# EAGLE board LED-driver I2C (EAGLE 6.3)

Size 160 x 100 mm. Coordinates in mm from the lower left corner, seen from the top.
Outline: 0,0 160,0 160,100 0,100 0,0
Copper layers (1*16): Top 0.035mm / dielectric 1.5mm / Bottom 0.035mm
Design rules "default": minimum track width 10mil, minimum drill 24mil, track to track 8mil, track to pad 8mil, pad to pad 8mil, via to via 8mil, smd to smd 8mil, copper to edge 40mil, drill to drill 8mil, minimum pad ring 10mil, minimum via ring 8mil, stop-mask expansion 4mil, vias tented up to drill 0mil, thermal gap 10mil

## Footprints (pad centres in the part's own frame; a part is rotated, then mirrored left to right if it is on the bottom)
SO16W = smd 0.6 x 2.2: 1 -4.445,-4.6; 2 -3.175,-4.6; 3 -1.905,-4.6; 4 -0.635,-4.6; 5 0.635,-4.6; 6 1.905,-4.6; 7 3.175,-4.6; 8 4.445,-4.6; 9 4.445,4.6; 10 3.175,4.6; 11 1.905,4.6; 12 0.635,4.6; 13 -0.635,4.6; 14 -1.905,4.6; 15 -3.175,4.6; 16 -4.445,4.6
TO252 = smd 1 x 1.6: 1 -2.28,-4.8; 2 2.28,-4.8 | smd 5.4 x 6.2: 3 0,2.5
RJ11-NO_SHIELD = drill 0.9 pad 1.4: 1 -3.175,8.89; 2 -1.905,6.35; 3 -0.635,8.89; 4 0.635,6.35; 5 1.905,8.89; 6 3.175,6.35 | hole 3.251: -5.08,0; 5.08,0
MA04-1 = drill 1.016 long: 1 -3.81,0; 2 -1.27,0; 3 1.27,0; 4 3.81,0
TO263 = smd 1 x 3.4: 1 -2.54,-6.6; 2 2.54,-6.6 | smd 6.8 x 9.6: 3 0,3.5
R0402 = smd 0.7 x 0.9: 1 -0.65,0; 2 0.65,0
SMS-003 = smd 1.092 x 2.007: 1 -2.54,-4.496; 2 0,-4.496; 3 2.54,-4.496; 4 2.54,4.496; 5 0,4.496; 6 -2.54,4.496

## Placement (x,y rotation side)
IC1  PCF8574T  [SO16W]  95.25,62.23 270 top
IC2  7805DT  [TO252]  41.91,87.63 0 top
J1  RJ11-2L-B  [RJ11-NO_SHIELD]  11.43,58.42 270 top
J2  RJ11-2L-B  [RJ11-NO_SHIELD]  11.43,77.47 270 top
LEDSTRIP  [MA04-1]  15.24,7.62 180 top
Q1  SPB80P06P  [TO263]  45.72,35.56 0 top
Q2  SPB80P06P  [TO263]  27.94,36.83 0 top
Q3  SPB80P06P  [TO263]  7.62,36.83 0 top
R1  10Ω  [R0402]  80.01,48.26 0 top
R2  10Ω  [R0402]  74.93,73.66 0 top
R3  10Ω  [R0402]  7.62,20.32 180 top
R4  2.7MΩ  [R0402]  54.61,48.26 270 top
R5  2.7MΩ  [R0402]  35.56,50.8 270 top
R6  2.7MΩ  [R0402]  6.35,24.13 180 top
R7  2.7MΩ  [R0402]  74.93,78.74 0 top
R8  2.7MΩ  [R0402]  80.01,52.07 0 top
R9  2.7MΩ  [R0402]  67.31,58.42 0 top
S1  SWS003  [SMS-003]  67.31,48.26 270 top

## Library data of the parts
IC1 = micro-philips; MPN: PCF8574T/3,512; OC_FARNELL: 1201255; OC_NEWARK: 70R6870
IC2 = linear
J1 J2 = con-tycoelectronics; MF: TYCO ELECTRONICS; MPN: RJ11-2L-B; OC_FARNELL: unknown; OC_NEWARK: 83F4463
LEDSTRIP = con-lstb; OC_FARNELL: unknown; OC_NEWARK: unknown
Q1-Q3 = F3205S
R1-R9 = rcl
S1 = smd-special

## Nets
AGND: IC1.8 IC2.3 J1.2 J2.2 Q1.2 Q2.2 Q3.2 R4.1 R5.1 R6.1 R7.1 R8.1 R9.1
N$1: IC1.15 J1.5 J2.5
N$2: IC1.14 J1.6 J2.6
N$4: Q1.1 R1.2 R4.2
N$5: Q2.1 R2.2 R5.2
N$6: Q3.1 R3.2 R6.2
N$7: LEDSTRIP.2 Q1.3
N$8: LEDSTRIP.3 Q2.3
N$9: LEDSTRIP.4 Q3.3
N$10: IC2.1 J1.1 J2.1 LEDSTRIP.1
N$12: IC1.1 R7.2 S1.6
N$13: IC1.2 R8.2 S1.5
N$14: IC1.3 R9.2 S1.4
N$15: IC1.16 IC2.2 S1.1 S1.2 S1.3
N$16: IC1.4 R1.1
N$17: IC1.5 R2.1
N$18: IC1.6 R3.1

## Tracks (layer width: path | path; a pad name or v marks a point on that pad's centre or on a via)
AGND  (12 unrouted)
N$1  (2 unrouted)
N$2  (2 unrouted)
N$4  (2 unrouted)
N$5  (2 unrouted)
N$6  (2 unrouted)
N$7  (1 unrouted)
N$8  (1 unrouted)
N$9  (1 unrouted)
N$10  (3 unrouted)
N$12  (2 unrouted)
N$13  (2 unrouted)
N$14  (2 unrouted)
N$15  (4 unrouted)
N$16  (1 unrouted)
N$17  (1 unrouted)
N$18  (1 unrouted)